# Altium PCB PCB1.PcbDoc
Units mm, origin at the board's own origin, x right, y up, seen from the top; angles counter-clockwise.
Board outline 200 x 100 mm, 2 copper layers (Top Layer, Bottom Layer), stack 1.569 mm thick; 29 components, 21 nets, 78 pads, 2 vias.
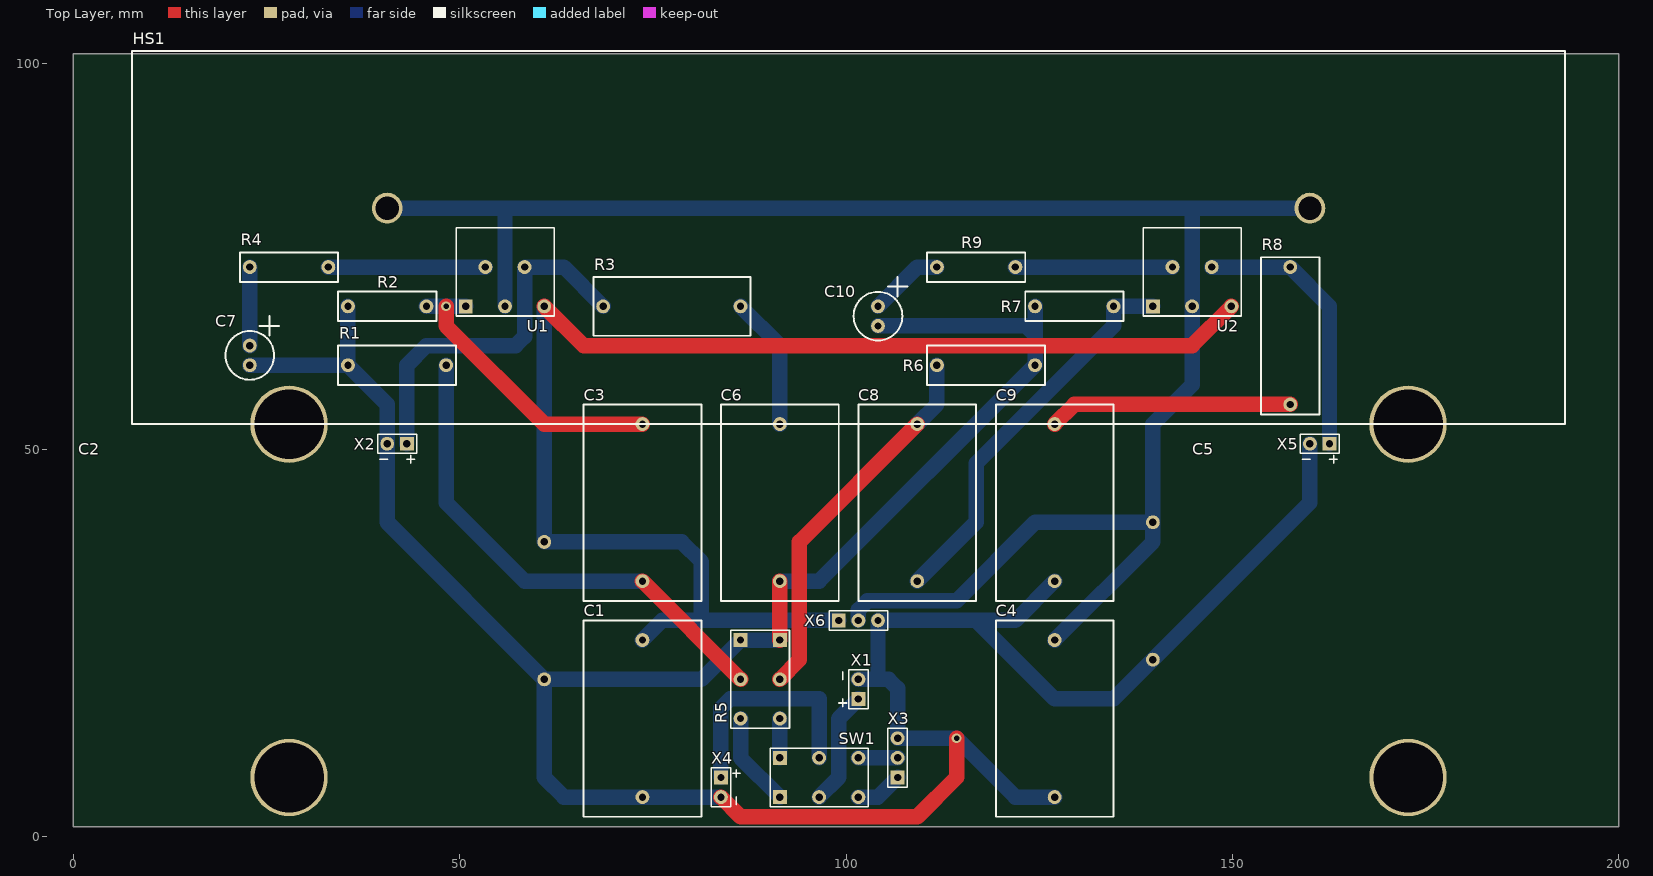
[diagram p0: Top Layer view]
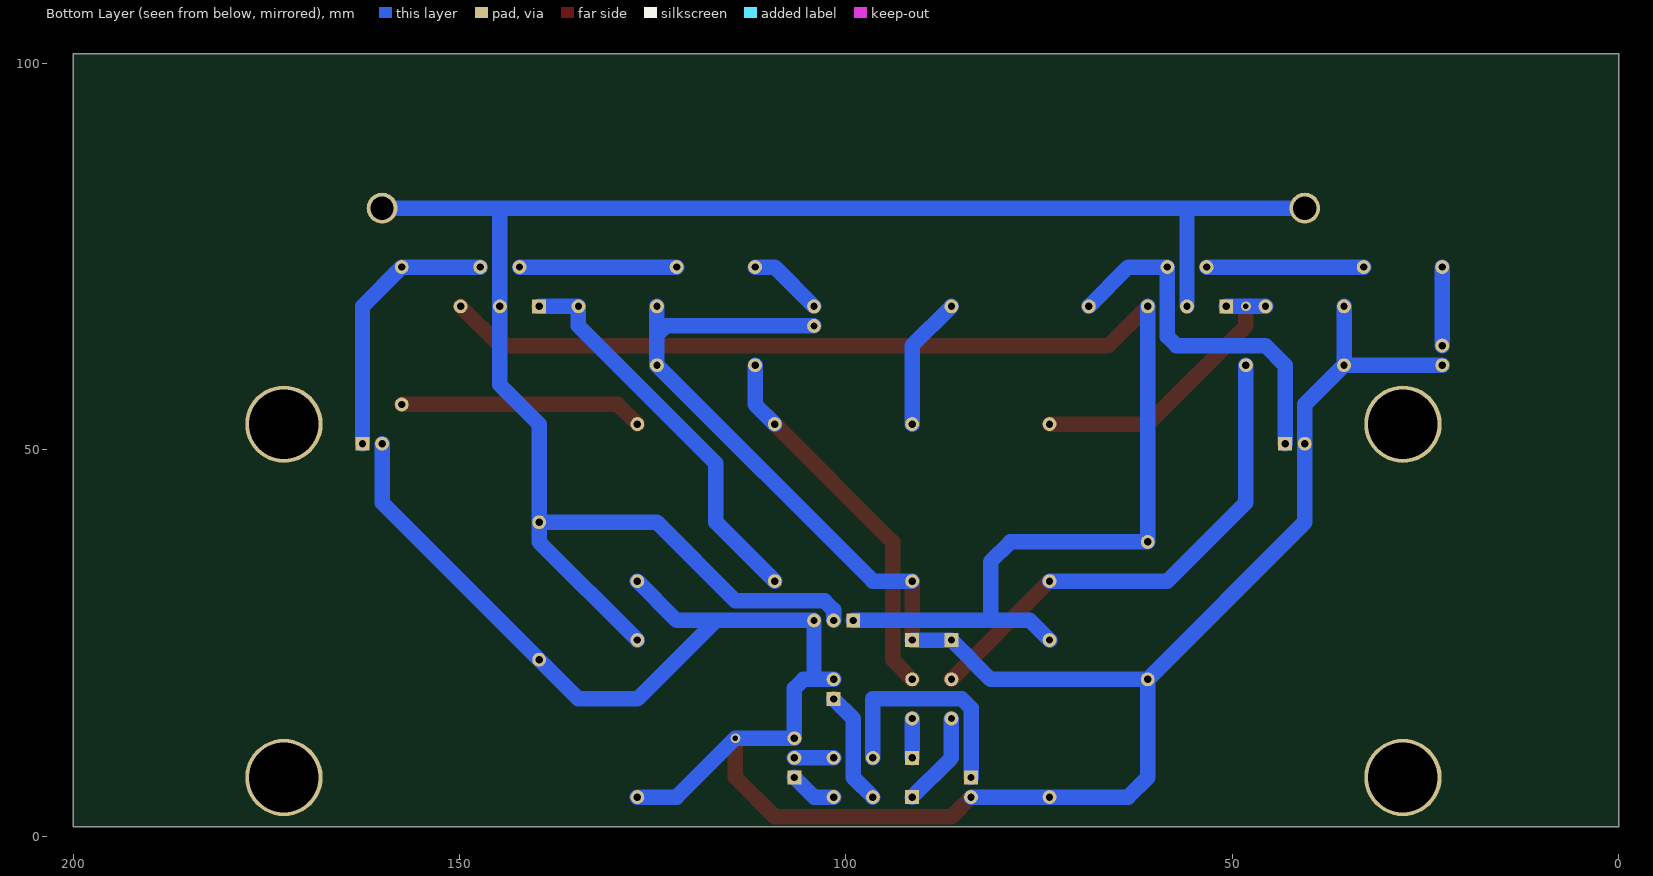
[diagram p1: Bottom Layer view, seen from below]
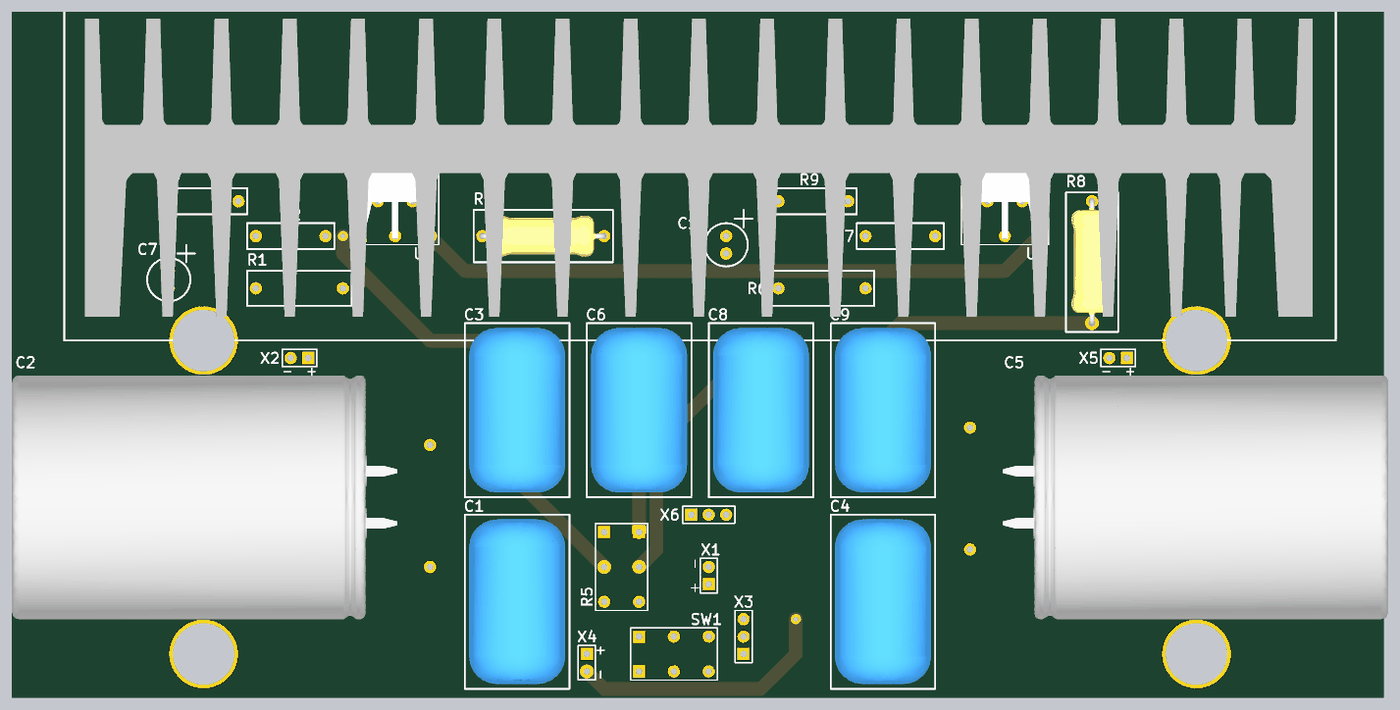
[diagram p2: 3D render of the assembled board from above, using the file's embedded part models]

## Layer stack, top to bottom
Top Solder: solder mask 0.0254, SM-001, Dk 4
Top Layer: signal copper 0.035
Dielectric 1: core 1.4986, Core-043, Dk 4.3
Bottom Layer: signal copper 0.035
Bottom Solder: solder mask 0.0254, SM-001, Dk 4

## Board outline
0,1.27 200,1.27 200,101.27 0,101.27

## Design rules (kind name [scope] priority, off if disabled: settings)
Clearance [All] p1: gap=0.254 ignorepadtopadclearanceinfootprint=TRUE except(0: Arc-Hole Track-Hole SMDPad-Hole THPad-Hole Via-Hole Fill-Hole Poly-Hole Region-Hole Text-Hole)
PolygonConnect [All] p1: connectstyle=Relief reliefconductorwidth=0.254 reliefentries=4 polygonreliefangle="90 Angle" airgapwidth=0.254
RoutingVias [All] p1: holewidth=0.711 width=1.27 viastyle="Through Hole" minholewidth=0.711 minwidth=1.27 maxholewidth=0.711 maxwidth=1.27
SilkToSilkClearance [All] p1 off: silktosilkclearance=0.254
SilkToSolderMaskClearance [IsPad] p1 off: minsilkscreentomaskgap=0.254 clearancetoexposedcopper=TRUE
SolderMaskExpansion [All] p1: expansion=0.102 istentingtop=FALSE
Width [All] p1: maxlimit=2 minlimit=0.254 preferedwidth=0.254
28 further rules are at their usual default settings.

## Components (designator, comment, footprint, x,y, rotation, side; value= is the part's Value field where it differs from the comment)
C1 "0.1uF" capK73-17 73.66,25.4 r270 top
C2 "10000uF" Capacitor_SnapIn_35x50mm 60.96,38.1 r0 top
C3 "2.2uF" capK73-17 73.66,33.02 r90 top
C4 "0.1uF" capK73-17 127,5.08 r90 top
C5 "10000uF" Capacitor_SnapIn_35x50mm 139.7,22.86 r180 top
C6 "0.22uF" capK73-17 91.44,33.02 r90 top
C7 "22uF" capRadial6.3x12mmP:2.5mm 22.86,63.5 r270 top
C8 "2.2uF" capK73-17 109.22,53.34 r270 top
C9 "0.22uF" capK73-17 127,33.02 r90 top
C10 "22uF" capRadial6.3x12mmP:2.5mm 104.14,68.58 r270 top
HS1 "HeatSink" HeatSink 40.64,81.28 r0 top
R1 "1М" res0.25W/1M/0.5pitch 35.56,60.96 r0 top
R2 "22к" res0.25W/22k/400mil 35.56,68.58 r0 top
R3 "1" res1W/1/700mil 86.36,68.58 r180 top
R4 "1к" res0.25W/1k/400mil 22.86,73.66 r0 top
R5 "10к" dualVarRes 91.44,25.4 r270 top
R6 "1М" res0.25W/1M/0.5pitch 124.46,60.96 r180 top
R7 "22к" res0.25W/22k/400mil 124.46,68.58 r0 top
R8 "1" res1W/1/700mil 157.48,55.88 r90 top
R9 "1к" res0.25W/1k/400mil 111.76,73.66 r0 top
SW1 "=Value" dualVarRes 91.44,10.16 r0 top
U1 "LM1875T/NOPB" TO220-5/2.54 50.8,73.66 r0 top
U2 "LM1875T/NOPB" TO220-5/2.54 139.7,73.66 r0 top
X1 "=Value" BUTTON_template 101.6,17.78 r90 top
X2 "=Value" BUTTON_template 43.18,50.8 r180 top
X3 "=Value" 3pim2.54Connector 106.68,7.62 r90 top
X4 "=Value" BUTTON_template 83.82,7.62 r270 top
X5 "=Value" BUTTON_template 162.56,50.8 r180 top
X6 "=Value" 3pim2.54Connector 99.06,27.94 r0 top

## Footprints (in the part's own frame and the unit in brackets; to place one, negate y for a bottom-side part, rotate by r counter-clockwise, add the part's x,y. Pads: shape width x height; smd on the part's side, far side on the other; paste and mask are expansions set on the pad)
3pim2.54Connector [mm] "Button_in"
  rect 1.8x1.8 hole 0.95: 1(0,0)
  round 1.8 hole 0.95: 2(2.54,0) 3(5.08,0)
  silkscreen extent -1.25,-1.25 6.35,1.25, body extent 0,0 0,0, height 0.2
BUTTON_template [mm] "Button_in"
  rect 1.8x1.8 hole 0.95: 1(0,0)
  round 1.8 hole 0.95: 2(2.54,0)
  silkscreen extent -1.25,-1.25 3.78,2.52, body extent 0,0 0,0, height 0.2
Capacitor_SnapIn_35x50mm [mm]
  round 10 hole 9: 0(-33.02,-30.48) 0(-33.02,15.24)
  round 1.8 hole 0.95: 1(0,0) 2(0,-17.78)
  body extent -60.96,-25.4 -4.78,10.16, height 37.78
capK73-17 [mm]
  round 1.8 hole 0.95: 1(0,0) 2(20.32,0)
  silkscreen extent -2.54,-7.62 22.86,7.62, body extent -1.84,-7 22.16,7, height 31
capRadial6.3x12mmP:2.5mm [mm]
  round 1.8 hole 0.95: 1(0,0) 2(2.54,0)
  silkscreen extent -3.81,-3.15 4.42,3.81, body extent -1.88,-3.15 4.42,3.15, height 12
dualVarRes [mm] "Button_in"
  rect 1.8x1.8 hole 0.95: 1(0,-5.08) 1'(0,0)
  round 1.8 hole 0.95: 2(5.08,-5.08) 2'(5.08,0) 3(10.16,-5.08) 3'(10.16,0)
  silkscreen extent -1.26,-6.35 11.43,1.25, body extent 0,0 0,0, height 0.2
HeatSink [mm]
  round 4 hole 3: 1(0,0) 1(119.38,0)
  silkscreen extent -33.02,-27.94 152.4,20.32, body extent -29.98,-24.48 149.02,19.02, height 44
res0.25W/1k/400mil [mm]
  round 1.8 hole 0.95: 1(0,0) 2(10.16,0)
  silkscreen extent -1.27,-1.91 11.43,1.91, body extent -0.3,-1.2 10.46,1.2, height 2.41
res0.25W/1M/0.5pitch [mm]
  round 1.8 hole 0.95: 1(0,0) 2(12.7,0)
  silkscreen extent -1.27,-2.54 13.97,2.54, body extent -0.37,-1.87 13.08,1.88, height 4.38
res0.25W/22k/400mil [mm]
  round 1.8 hole 0.95: 1(0,0) 2(10.16,0)
  silkscreen extent -1.27,-1.91 11.43,1.91, body extent -0.3,-1.2 10.46,1.2, height 2.41
res1W/1/700mil [mm]
  round 1.8 hole 0.95: 1(0,0) 2(17.78,0)
  silkscreen extent -1.27,-3.81 19.05,3.81, body extent -0.3,-3 18.28,3, height 6.5
TO220-5/2.54 [mm] "DS1023-2x7"
  rect 1.8x1.8 hole 0.95: 1(0,-5.08)
  round 1.8 hole 0.95: 2(2.54,0) 3(5.08,-5.08) 4(7.62,0) 5(10.16,-5.08)
  silkscreen extent -1.25,-6.33 11.45,5.06, body extent -0.48,-5.59 10.64,4.44, height 23.17

## Part data
C1 C4: library part "К73-17, 0.1 мкФ, 250 В, 5%", "26320"
C2 C5: library part "ECAP (К50-35), 10000 мкФ, 50 В, 105°C, 20%", "26320"
C3 C8: library part "К73-17, 2.2 мкФ, 63 В, 5%", "8016"
C6 C9: library part "К73-17, 0.22 мкФ, 63 В, 5%", "61862"
C7 C10: library part "ECAP (К50-35), 10000 мкФ, 50 В, 105°C, 20%_1", "9000565851"
R1 R6: library part "CF-25 (С1-4) 0.25 Вт, 1 МОм, 5%", "51741"
R2 R7: library part "1/4W22K, Резистор угольный 1/4Вт 22 кОм 2,5X7мм 5%", "8007031688"
R3 R8: library part "MO-100 (С2-23) 1 Вт, 1 Ом, 5%", "24035"
R4 R9: library part "CF-25 (С1-4) 0.25 Вт, 1 кОм, 5%", "44435"
R5: library part "RK-1233G1-A10K, L15KC, 2 х 10 кОм", "588623436"
SW1: library part SWITCHER, "-"
U1 U2: "12717"
X1 X2 X4 X5: library part 2pinConnector, "Generic connector", Parameter 1=GND
  X1: Parameter 2=IN_L
  X2: Parameter 2=OUT_L
  X4: Parameter 2=IN_R
  X5: Parameter 2=OUT_R
X3: library part BluetoothModule, "Input from Bluetooth module"
X6: library part 3pinConnector, "Generic connector", Parameter 1=GND, Parameter 2=-VEE, Parameter 3=+VCC

## Via types
v1: diameter 1.27, hole 0.711, Top Layer to Bottom Layer, 2 vias

## Nets (pads, with @x,y where several pads share a name; then routed paths per layer and width w, separated by ;. In a path a pad name is that pad's centre, name@x,y a point inside that pad or via, vN(x,y) a via of type N, cw(c..) or ccw(c..) an arc to the next point about the centre after c; other vN are vias at no path point)
+VCC: C1.1 C2.1 U1.5 U2.5 X6.1 | length 179
  Top Layer w2: U1.5 66.04,63.5 144.78,63.5 U2.5
  Bottom Layer w2: U1.5 C2.1 78.74,38.1 81.28,35.56 81.28,27.94 ; C1.1 76.2,27.94 81.28,27.94 ; X6.1 81.28,27.94
-VEE: C4.2 C5.2 HS1.1 U1.3 U2.3 X6.2 | length 239.5
  Bottom Layer w2: HS1.1@40.64,81.28 55.88,81.28 ; U1.3 55.88,81.28 ; X6.2 101.6,29.308 102.772,30.48 114.3,30.48 124.46,40.64 C5.2 ; C4.2 139.7,38.1 C5.2 ; HS1.1@160.02,81.28 144.78,81.28 ; 55.88,81.28 144.78,81.28 ; C5.2 139.7,53.34 144.78,58.42 U2.3 144.78,81.28
AMP_L_IN_REG: C3.1 R1.2 R5.2 | length 65.3
  Top Layer w2: C3.1 R5.2
  Bottom Layer w2: R1.2 48.26,43.18 58.42,33.02 C3.1
AMP_L_NEG_IN: R4.2 U1.2 | length 20.3
  Bottom Layer w2: R4.2 U1.2
AMP_L_POS_IN: C3.2 R2.2 U1.1 | length 38.3
  Top Layer w2: v1(48.26,68.58) 48.26,66.04 60.96,53.34 C3.2
  Bottom Layer w2: R2.2 v1(48.26,68.58) U1.1
AMP_R_IN_REG: C8.1 R5.2' R6.2 | length 49.1
  Top Layer w2: R5.2' 93.98,22.86 93.98,38.1 C8.1
  Bottom Layer w2: C8.1 111.76,55.88 R6.2
AMP_R_NEG_IN: R9.2 U2.2 | length 20.3
  Bottom Layer w2: R9.2 U2.2
AMP_R_POS_IN: C8.2 R7.2 U2.1 | length 51.2
  Bottom Layer w2: C8.2 116.84,40.64 116.84,48.26 134.62,66.04 R7.2 U2.1
BL_OUT_L: SW1.3 X3.1 | length 6.1
  Bottom Layer w2: SW1.3 104.14,5.08 X3.1
BL_OUT_R: SW1.3' X3.2 | length 5.1
  Bottom Layer w2: SW1.3' X3.2
GND: C1.2 C2.2 C4.1 C5.1 C6.1 C7.2 C9.1 C10.2 R1.1 R2.1 R5.1 R5.1' R6.1 R7.1 X1.2 X2.2 X3.3 X4.2 X5.2 X6.3 | length 393.6
  Top Layer w2: X4.2 86.36,2.54 109.22,2.54 114.3,7.62 v1(114.3,12.7) ; R5.1' C6.1
  Bottom Layer w2: C7.2 R1.1 ; R2.1 R1.1 ; X4.2 C1.2 63.5,5.08 60.96,7.62 C2.2 ; R5.1' R5.1 81.28,20.32 C2.2 ; C6.1 96.52,33.02 R6.1 124.46,64.868 ; X1.2 104.14,20.32 ; C10.2 123.288,66.04 124.46,64.868 ; R7.1 124.46,64.868 ; C4.1 121.92,5.08 v1(114.3,12.7) X3.3 106.68,19.148 105.508,20.32 104.14,20.32 ; C9.1 121.92,27.94 116.84,27.94 ; X5.2 160.02,43.18 C5.1 134.62,17.78 127,17.78 116.84,27.94 ; R1.1 40.64,55.88 40.64,53.34 40.64,40.64 C2.2 ; 104.14,20.32 X6.3 116.84,27.94
IN_L: SW1.2 X1.1 | length 14.8
  Bottom Layer w2: SW1.2 99.06,7.62 99.06,15.24 X1.1
IN_R: SW1.2' X4.1 | length 29.8
  Bottom Layer w2: X4.1 83.82,16.608 84.992,17.78 96.52,17.78 SW1.2'
NetC6_2: C6.2 R3.1 | length 17.3
  Bottom Layer w2: R3.1 91.44,63.5 C6.2
NetC7_1: C7.1 R4.1 | length 10.2
  Bottom Layer w2: C7.1 R4.1
NetC9_2: C9.2 R8.1 | length 31.5
  Top Layer w2: C9.2 129.54,55.88 R8.1
NetC10_1: C10.1 R9.1 | length 9.7
  Bottom Layer w2: C10.1 109.22,73.66 R9.1
OUT_L: R3.2 U1.4 X2.1 | length 48.2
  Bottom Layer w2: X2.1 43.18,60.96 45.72,63.5 57.248,63.5 58.42,64.672 U1.4 63.5,73.66 R3.2
OUT_R: R8.2 U2.4 X5.1 | length 35.1
  Bottom Layer w2: U2.4 R8.2 162.56,68.58 X5.1
SW_OUT_L: R5.3 SW1.1 | length 12.3
  Bottom Layer w2: R5.3 86.36,10.16 SW1.1
SW_OUT_R: R5.3' SW1.1' | length 5.1
  Bottom Layer w2: SW1.1' R5.3'
pads on no net: C2.0 C5.0

## Silkscreen, mask and mechanical layers (free items; w line width, h text height)
Mechanical 1:
  drawing of 5646 lines, arcs and shapes, not listed
  text "1" at 0.254,95.758 h1.52
  text "1" at 197.358,95.758 h1.52
  text "2" at 0.254,93.218 h1.52
  text "2" at 197.358,93.218 h1.52
  text "3" at 0.254,90.678 h1.52
  text "3" at 197.358,90.678 h1.52
  text "4" at 0.254,88.138 h1.52
  text "4" at 197.358,88.138 h1.52
  text "5" at 0.254,85.598 h1.52
  text "5" at 197.358,85.598 h1.52
  text "6" at 0.254,83.058 h1.52
  text "6" at 197.358,83.058 h1.52
  text "7" at 0.254,80.518 h1.52
  text "7" at 197.358,80.518 h1.52
  text "8" at 0.254,77.978 h1.52
  text "8" at 197.358,77.978 h1.52
  text "9" at 0.254,75.438 h1.52
  text "9" at 197.358,75.438 h1.52
  text "10" at 0.254,72.898 h1.52
  text "10" at 197.358,72.898 h1.52
  text "11" at 0.254,70.358 h1.52
  text "11" at 197.358,70.358 h1.52
  text "12" at 0.254,67.818 h1.52
  text "12" at 197.358,67.818 h1.52
  text "13" at 0.254,65.278 h1.52
  text "13" at 197.358,65.278 h1.52
  text "14" at 0.254,62.738 h1.52
  text "14" at 197.358,62.738 h1.52
  text "15" at 0.254,60.198 h1.52
  text "15" at 197.358,60.198 h1.52
  text "16" at 0.254,57.658 h1.52
  text "16" at 197.358,57.658 h1.52
  text "17" at 0.254,55.118 h1.52
  text "17" at 197.358,55.118 h1.52
  text "18" at 0.254,52.578 h1.52
  text "18" at 197.358,52.578 h1.52
  text "1" at 0.254,47.498 h1.52
  text "1" at 197.358,47.498 h1.52
  text "2" at 0.254,44.958 h1.52
  text "2" at 197.358,44.958 h1.52
  text "3" at 0.254,42.418 h1.52
  text "3" at 197.358,42.418 h1.52
  text "4" at 0.254,39.878 h1.52
  text "4" at 197.358,39.878 h1.52
  text "5" at 0.254,37.338 h1.52
  text "5" at 197.358,37.338 h1.52
  text "6" at 0.254,34.798 h1.52
  text "6" at 197.358,34.798 h1.52
  text "7" at 0.254,32.258 h1.52
  text "7" at 197.358,32.258 h1.52
  text "8" at 0.254,29.718 h1.52
  text "8" at 197.358,29.718 h1.52
  text "9" at 0.254,27.178 h1.52
  text "9" at 197.358,27.178 h1.52
  text "10" at 0.254,24.638 h1.52
  text "10" at 197.358,24.638 h1.52
  text "11" at 0.254,22.098 h1.52
  text "11" at 197.358,22.098 h1.52
  text "12" at 0.254,19.558 h1.52
  text "12" at 197.358,19.558 h1.52
  text "13" at 0.254,17.018 h1.52
  text "13" at 197.358,17.018 h1.52
  text "14" at 0.254,14.478 h1.52
  text "14" at 197.358,14.478 h1.52
  text "15" at 0.254,11.938 h1.52
  text "15" at 197.358,11.938 h1.52
  text "16" at 0.254,9.398 h1.52
  text "16" at 197.358,9.398 h1.52
  text "17" at 0.254,6.858 h1.52
  text "17" at 197.358,6.858 h1.52
  text "18" at 0.254,4.318 h1.52
  text "18" at 197.358,4.318 h1.52
  text "A" at 4.572,1.524 h1.52
  text "B" at 7.112,1.524 h1.52
  text "C" at 9.652,1.524 h1.52
  text "D" at 12.192,1.524 h1.52
  text "E" at 14.732,1.524 h1.52
  text "F" at 17.272,1.524 h1.52
  text "G" at 19.812,1.524 h1.52
  text "H" at 22.352,1.524 h1.52
  text "I" at 24.892,1.524 h1.52
  text "J" at 26.797,1.524 h1.52
  text "K" at 29.972,1.524 h1.52
  text "L" at 32.512,1.524 h1.52
  text "M" at 35.052,1.524 h1.52
  text "N" at 37.592,1.524 h1.52
  text "O" at 40.132,1.524 h1.52
  text "P" at 42.672,1.524 h1.52
  text "Q" at 45.212,1.524 h1.52
  text "R" at 47.752,1.524 h1.52
  text "S" at 50.292,1.524 h1.52
  text "T" at 52.832,1.524 h1.52
  text "U" at 55.372,1.524 h1.52
  text "V" at 57.912,1.524 h1.52
  text "W" at 60.452,1.524 h1.52
  text "X" at 62.992,1.524 h1.52
  text "Y" at 65.532,1.524 h1.52
  text "Z" at 68.072,1.524 h1.52
  text "1" at 70.612,1.524 h1.52
  text "2" at 73.152,1.524 h1.52
  text "3" at 75.692,1.524 h1.52
  text "4" at 78.232,1.524 h1.52
  text "5" at 80.772,1.524 h1.52
  text "6" at 83.312,1.524 h1.52
  text "7" at 85.852,1.524 h1.52
  text "A" at 101.092,1.524 h1.52
  text "B" at 103.632,1.524 h1.52
  text "C" at 106.172,1.524 h1.52
  text "D" at 108.712,1.524 h1.52
  text "E" at 111.252,1.524 h1.52
  text "F" at 113.792,1.524 h1.52
  text "G" at 116.332,1.524 h1.52
  text "H" at 118.872,1.524 h1.52
  text "I" at 121.412,1.524 h1.52
  text "J" at 123.317,1.524 h1.52
  text "K" at 126.492,1.524 h1.52
  text "L" at 129.032,1.524 h1.52
  text "M" at 131.572,1.524 h1.52
  text "N" at 134.112,1.524 h1.52
  text "O" at 136.652,1.524 h1.52
  text "P" at 139.192,1.524 h1.52
  text "Q" at 141.732,1.524 h1.52
  text "R" at 144.272,1.524 h1.52
  text "S" at 146.812,1.524 h1.52
  text "T" at 149.352,1.524 h1.52
  text "U" at 151.892,1.524 h1.52
  text "V" at 154.432,1.524 h1.52
  text "W" at 156.972,1.524 h1.52
  text "X" at 159.512,1.524 h1.52
  text "Y" at 162.052,1.524 h1.52
  text "Z" at 164.592,1.524 h1.52
  text "1" at 167.132,1.524 h1.52
  text "2" at 169.672,1.524 h1.52
  text "3" at 172.212,1.524 h1.52
  text "4" at 174.752,1.524 h1.52
  text "5" at 177.292,1.524 h1.52
  text "6" at 179.832,1.524 h1.52
  text "7" at 182.372,1.524 h1.52